# EAGLE board SMD_Hardware_V0.1 (EAGLE 7.6.0)

Size 63.17 x 50.79 mm. Coordinates in mm from the lower left corner, seen from the top.
Outline: 0,0 63.17,0 63.17,50.79 0,50.79 0,0
Copper layers (1*16): Top 0.035mm / dielectric 1.5mm / Bottom 0.035mm
Design rules "default": minimum track width 10mil, minimum drill 24mil, track to track 8mil, track to pad 8mil, pad to pad 8mil, via to via 8mil, smd to smd 8mil, copper to edge 40mil, drill to drill 8mil, minimum pad ring 10mil, minimum via ring 8mil, stop-mask expansion 4mil, vias tented up to drill 0mil, thermal gap 10mil

## Footprints (pad centres in the part's own frame; a part is rotated, then mirrored left to right if it is on the bottom)
22-23-2021 = drill 1 long: 1 -1.27,0; 2 1.27,0
C0603 = smd 1.1 x 1: 1 -0.85,0; 2 0.85,0
140CLH-0810 = smd 3.5 x 2.5: + 3.25,0; - -3.25,0
C0805 = smd 1.3 x 1.5: 1 -0.95,0; 2 0.95,0
C025-024X044 = drill 0.813 octagon: 1 -1.27,0; 2 1.27,0
SO08 = smd 0.6 x 2.2: 1 -1.905,-2.6; 2 -0.635,-2.6; 3 0.635,-2.6; 4 1.905,-2.6; 5 1.905,2.6; 6 0.635,2.6; 7 -0.635,2.6; 8 -1.905,2.6
Q = drill 0.61 long: 1 -2.54,-7.62; 2 2.54,-7.62
R0603 = smd 1 x 1.1: 1 -0.85,0; 2 0.85,0
10X02MTA = drill 1.016 long: 1 1.27,0; 2 -1.27,0
SOIC28-W_MC = smd 1.981 x 0.559: 1 -4.521,8.255; 2 -4.521,6.985; 3 -4.521,5.715; 4 -4.521,4.445; 5 -4.521,3.175; 6 -4.521,1.905; 7 -4.521,0.635; 8 -4.521,-0.635; 9 -4.521,-1.905; 10 -4.521,-3.175; 11 -4.521,-4.445; 12 -4.521,-5.715; 13 -4.521,-6.985; 14 -4.521,-8.255; 15 4.521,-8.255; 16 4.521,-6.985; 17 4.521,-5.715; 18 4.521,-4.445; 19 4.521,-3.175; 20 4.521,-1.905; 21 4.521,-0.635; 22 4.521,0.635; 23 4.521,1.905; 24 4.521,3.175; 25 4.521,4.445; 26 4.521,5.715; 27 4.521,6.985; 28 4.521,8.255
SOIC14-N_MC = smd 1.981 x 0.559: 1 -2.362,3.81; 2 -2.362,2.54; 3 -2.362,1.27; 4 -2.362,0; 5 -2.362,-1.27; 6 -2.362,-2.54; 7 -2.362,-3.81; 8 2.362,-3.81; 9 2.362,-2.54; 10 2.362,-1.27; 11 2.362,0; 12 2.362,1.27; 13 2.362,2.54; 14 2.362,3.81
10X03MTA = drill 1.016 long: 1 2.54,0; 2 0,0; 3 -2.54,0

## Placement (x,y rotation side)
BAT1  [22-23-2021]  59.69,31.75 0 top
C1  .1uF  [C0603]  15.24,31.75 270 top
C2  [C0603]  10.16,31.75 0 top
C3  [C0603]  45.72,48.26 90 top
C4  .1uF 400V  [140CLH-0810]  29.21,34.29 180 top
C5  220uF 25V  [140CLH-0810]  44.45,34.29 180 top
C6  [C0805]  20.32,12.7 180 top
C7  [C0805]  38.1,30.48 0 top
C8  [C0805]  34.29,8.89 90 top
C9  [C0805]  27.94,2.54 0 top
C10  10pF  [C025-024X044]  -10.16,-12.7 0 top  (outside the outline)
C11  10pF  [C025-024X044]  -10.16,-17.78 0 top  (outside the outline)
IC1  LM386M-1  [SO08]  11.43,8.89 0 top
MIC  [22-23-2021]  3.81,46.99 0 top
Q1  12 MHz (ATS12A)  [Q]  -7.62,1.27 0 top  (outside the outline)
R1  10k  [R0603]  20.32,31.75 0 top
R2  1k  [R0603]  20.32,24.13 0 top
R3  100k  [R0603]  20.32,27.94 0 top
R4  10k  [R0603]  20.32,20.32 0 top
R5  10k  [R0603]  20.32,16.51 0 top
R6  10k  [R0603]  2.54,31.75 0 top
R7  10k  [R0603]  2.54,27.94 0 top
R8  Rheostat  [R0603]  2.54,24.13 0 top
R9  10k  [R0603]  2.54,20.32 0 top
R10  10k  [R0603]  2.54,13.97 0 top
R11  10k  [R0603]  2.54,10.16 0 top
R12  10  [R0603]  31.75,49.53 180 top
R13  [R0603]  2.54,6.35 0 top
R14  [R0603]  2.54,2.54 180 top
R15  1k  [R0603]  1.27,-2.54 0 top
R16  1k  [R0603]  1.27,-6.35 0 top  (outside the outline)
SPK1  [10X02MTA]  54.61,44.45 90 top
U$1  DSPIC33FJ128GP802-X_SO  [SOIC28-W_MC]  39.37,17.78 45 top
U$2  MCP6024-X/SL  [SOIC14-N_MC]  11.43,22.86 90 top
VOL  [10X03MTA]  12.7,46.99 0 top

## Library data of the parts
BAT1 MIC = con-molex; MF: MOLEX; MPN: 22-23-2021; OC_FARNELL: 1462926; OC_NEWARK: 25C3832
C1-C11 R1-R16 = resistor
IC1 = linear
Q1 = special
SPK1 VOL = con-amp
U$1 U$2 = Microchip_DSP

## Nets
GND: BAT1.1 C6.2 C9.2 C10.2 C11.2 IC1.2 IC1.4 MIC.2 R4.1 R11.1 R12.1 R15.2 SPK1.2 U$2.11 VOL.3
N$1: C1.1 MIC.1 R1.1
N$2: C1.2 R2.1
N$3: R2.2 R3.1 U$2.2
N$4: R4.2 R5.1 U$2.3
N$5: R9.1 R10.1 R11.2
N$7: C2.1 R8.1 U$2.14
N$8: R6.1 R8.2 U$2.13
N$9: R7.2 U$1.24
N$10: R7.1 R9.2 U$2.12
N$11: R6.2 U$1.23
N$12: C4.- U$1.2
N$13: BAT1.2 IC1.6
N$14: C2.2 VOL.1
N$15: C3.2 C5.+ IC1.5
N$16: C3.1 R12.2
N$17: C5.- SPK1.1
N$18: C6.1 U$1.20
N$19: C8.1 U$1.13
N$20: C8.2 U$1.8 U$1.19
N$21: C7.1 U$1.28
N$22: C7.2 U$1.27
N$23: C9.1 R13.1 R14.2
N$24: R14.1 U$1.1
N$25: IC1.3 VOL.2
N$26: C4.+ R3.2 R15.1 R16.2 U$2.1
N$28: C11.1 Q1.1 U$1.9
N$29: C10.1 Q1.2 U$1.10
VDD: R1.2 R5.2 R10.2 R13.2 R16.1 U$2.4

## Tracks (layer width: path | path; a pad name or v marks a point on that pad's centre or on a via)
GND  (14 unrouted)
N$1  (2 unrouted)
N$2  (1 unrouted)
N$3  (2 unrouted)
N$4  (2 unrouted)
N$5  (2 unrouted)
N$7  (2 unrouted)
N$8  (2 unrouted)
N$9  (1 unrouted)
N$10  (2 unrouted)
N$11  (1 unrouted)
N$12  (1 unrouted)
N$13  (1 unrouted)
N$14  (1 unrouted)
N$15  (2 unrouted)
N$16  (1 unrouted)
N$17  (1 unrouted)
N$18  (1 unrouted)
N$19  (1 unrouted)
N$20  (2 unrouted)
N$21  (1 unrouted)
N$22  (1 unrouted)
N$23  (2 unrouted)
N$24  (1 unrouted)
N$25  (1 unrouted)
N$26  (4 unrouted)
N$28  (2 unrouted)
N$29  (2 unrouted)
VDD  (5 unrouted)